# Altium PCB PCB_assembly_drawing.PcbDoc (part 5 of 5)
Units mm, origin at the board's own origin, x right, y up, seen from the top; angles counter-clockwise.
Board outline 425 x 295 mm, 2 copper layers (Top Layer, Bottom Layer); 485 components, 419 nets, 1569 pads, 847 vias.
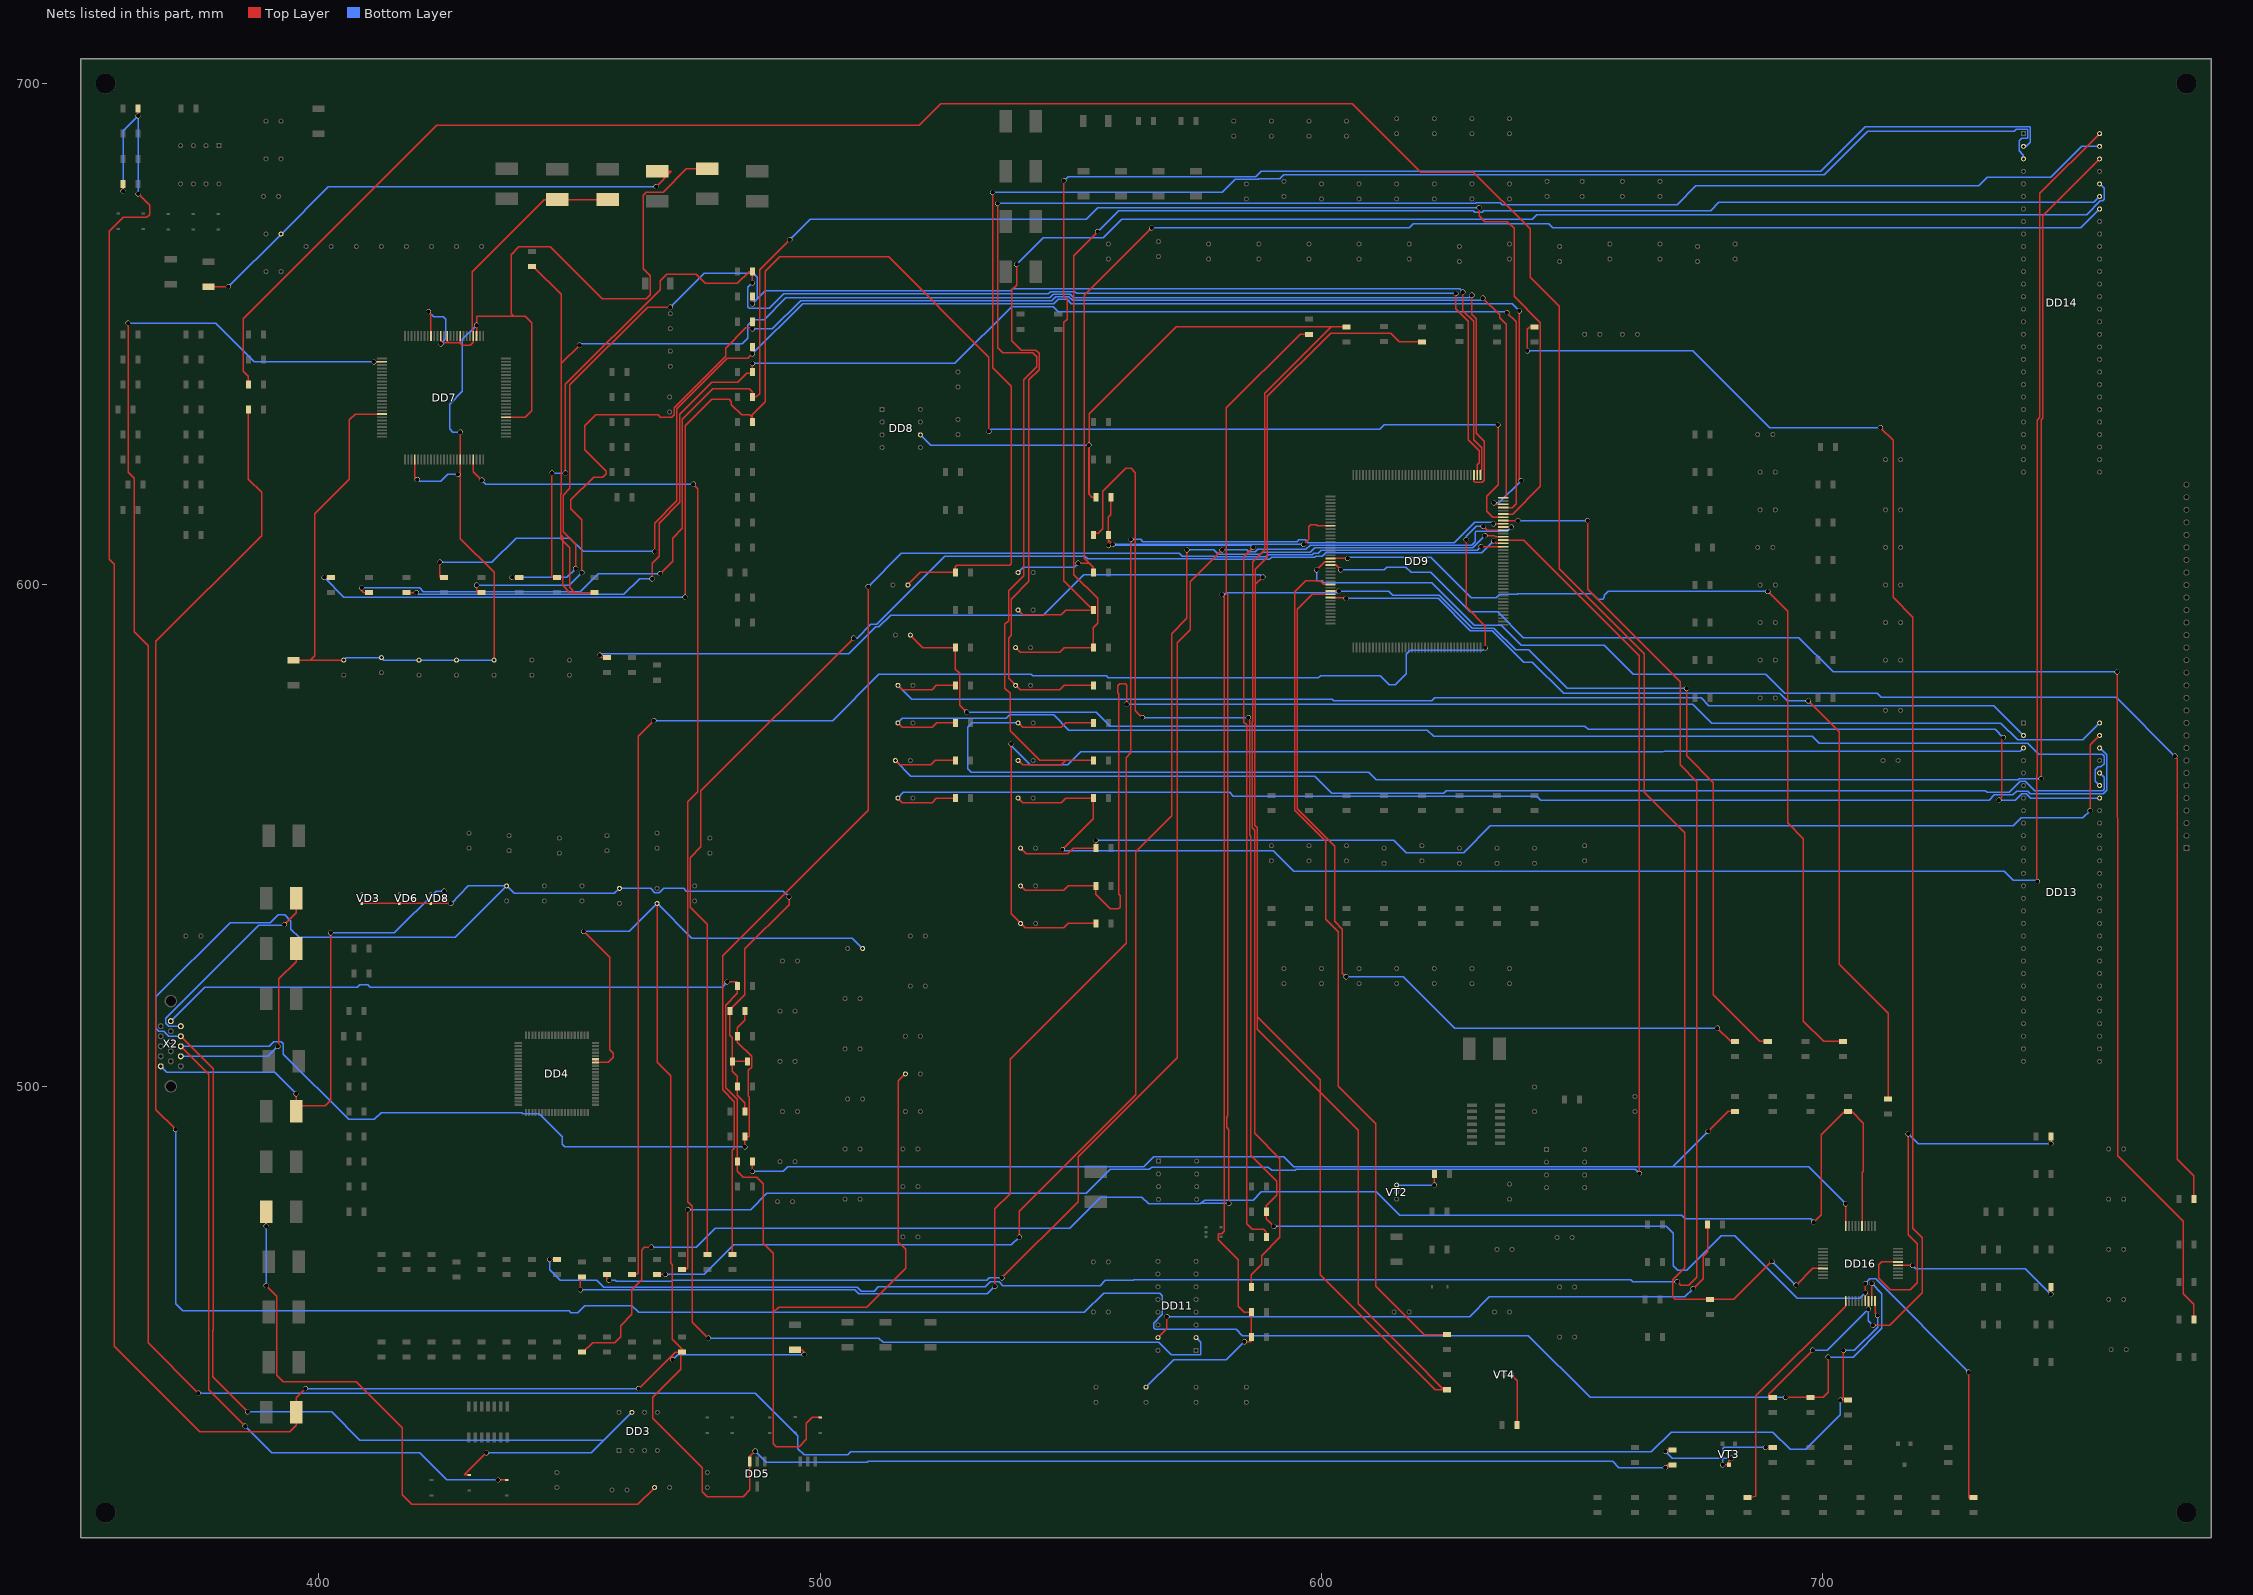
[diagram p5: the nets of this part, all layers, seen from the top]

## Via types
v1: diameter 1, hole 0.9, Top Layer to Bottom Layer, 847 vias

## Nets (pads, with @x,y where several pads share a name; then routed paths per layer and width w, separated by ;. In a path a pad name is that pad's centre, name@x,y a point inside that pad or via, vN(x,y) a via of type N, cw(c..) or ccw(c..) an arc to the next point about the centre after c; other vN are vias at no path point) (continued)
NetR236_1: R236.1 R237.1 VT3.3 | length 31.5
  Top Layer w0.25: v1(668.579,427.228) 668.851,427.5 R237.1@670,427.5 ; v1(679.983,424.5) VT3.3@681.25,424.5 681.25,425.374 v1(681.758,425.882) ; v1(688.569,427.99) 688.579,428 R236.1@690,428
  Bottom Layer w0.25: v1(668.579,427.228) 669.925,425.882 679.983,425.882 ; v1(679.983,424.5) 679.983,425.882 ; v1(681.758,425.882) 679.983,425.882 ; v1(688.569,427.99) 680.237,427.99 679.983,427.736 679.983,425.882
NetR238_1: R238.1 VT4.3 | length 10.5
  Top Layer w0.25: VT4.3@637.8,442.5 639,441.3 R238.1@639,432.5
NetR239_1: R239.1 VT2.3 | length 9.7
  Top Layer w0.25: v1(622.5,480.3) R239.1@622.5,482.5
  Bottom Layer w0.25: VT2.3@615,480.3 v1(622.5,480.3)
O3_3V: C43.1 C46.2 C48.2 C51.2 C53.2 C54.2 DD7.18 DD7.29 DD7.43 DD7.57 DD7.78 L14.2 | length 305.4
  Top Layer w0.25: C43.1@395,585 398.348,585 ; C46.2@405,585 398.348,585 ; DD7.18@412.65,634.1 407.278,634.1 406.146,632.968 406.146,621.132 399.237,614.223 399.237,585.889 398.348,585 ; DD7.29@419.15,625 419.15,621.513 v1(419.658,621.005) ; v1(427.742,622.068) 428.25,622.576 ; v1(428.25,630.473) DD7.43@428.25,625 428.25,622.576 ; DD7.78@431.5,649.7 v1(431.5,651.835) 431.5,653.593 438.912,653.593 ; C54.2@435,585 435,602.514 428.25,609.264 428.25,622.576 ; DD7.57@437.35,633.45 441.187,633.45 442.519,634.781 442.519,652.272 441.198,653.593 438.912,653.593 ; L14.2@477.5,683 473.348,683 468.706,678.358 465.328,678.358 464.744,677.774 464.744,663.042 466.115,661.67 466.115,657.86 465.353,657.098 456.54,657.098 446.227,667.41 439.928,667.41 438.379,665.861 438.379,654.126 438.912,653.593
  Bottom Layer w0.25: C46.2@405,585 405.5,585.5 C48.2@412.5,585.5 413,585 C51.2@420,585 C53.2@427.5,585 C54.2@435,585 ; v1(419.658,621.005) 419.982,620.681 424.388,620.681 425.775,622.068 v1(427.742,622.068) ; v1(428.25,630.473) 426.777,630.473 426.11,631.139 426.11,636.067 428.65,638.607 428.65,648.985 v1(431.5,651.835)
OSD_B: DD9.22 R190.2 | length 301.7
  Top Layer w0.25: DD9.22@601.8,604 602.805,604 v1(603.809,602.996) ; v1(758.657,582.676) 758.657,553.679 758.85,553.486 758.85,486.131 771.83,473.151 771.83,458.684 774,456.514 R190.2@774,453.5
  Bottom Layer w0.25: v1(603.809,602.996) 612.47,602.996 613.054,603.58 616.788,603.58 617.855,602.513 621.789,602.513 629.688,594.614 635.152,594.614 640.258,589.509 695.223,589.509 702.056,582.676 v1(758.657,582.676)
OSD_CLK: C131.1 DD9.30 R175.2 R176.2 R193.2 | length 359.3
  Top Layer w0.25: v1(580.136,598.103) 580.644,597.595 580.644,494.61 580.556,494.523 580.556,491.02 580.644,490.932 580.644,471.094 580.136,470.586 579.375,470.586 579.375,469.417 583.387,465.405 583.387,456.184 584.581,454.99 R175.2@586,454.99 ; v1(584.606,449.072) 586,449.072 R176.2@586,450 R175.2@586,454.99 ; R175.2@586,455 R175.2@586,454.99 ; DD9.30@601.8,598.8 v1(603.428,598.8) ; v1(672.821,579.374) 672.821,565.937 678.155,560.603 678.155,518.296 687.451,509 R193.2@689,509
  Bottom Layer w0.25: C131.1@565,440 570.491,445.491 581.025,445.491 v1(584.606,449.072) ; v1(580.136,598.103) 580.644,598.103 580.974,598.433 603.061,598.433 v1(603.428,598.8) 613.364,598.8 614.172,597.992 623.519,597.992 630.098,591.414 634.34,591.414 638.708,587.045 641.299,587.045 648.97,579.374 v1(672.821,579.374)
OSD_G: DD9.21 R191.2 | length 281.1
  Top Layer w0.25: v1(599.034,602.996) 600.688,604.65 DD9.21@601.8,604.65 ; v1(770.204,565.887) 770.712,565.379 770.712,485.431 774,482.143 R191.2@774,477.5
  Bottom Layer w0.25: v1(599.034,602.996) 599.034,600.964 599.161,600.837 600.114,600.837 600.495,600.456 621.944,600.456 630.467,591.933 635.852,591.933 639.801,587.985 656.387,587.985 662.178,582.193 688.619,582.193 692.37,578.443 710.797,578.443 711.626,577.613 758.478,577.613 v1(770.204,565.887)
OSD_HS: DD9.31 R194.2 | length 168.1
  Top Layer w0.25: DD9.31@601.8,598.15 598.195,598.15 595.194,595.149 595.194,555.324 602.615,547.903 602.615,532.892 604.164,531.343 604.164,522.605 v1(604.901,521.868) ; v1(678.967,511.607) 681.574,509 R194.2@682.5,509
  Bottom Layer w0.25: v1(604.901,521.868) 616.355,521.868 626.617,511.607 v1(678.967,511.607)
OSD_R: DD9.20 R192.2 | length 190.4
  Top Layer w0.25: DD9.20@601.8,605.3 605.224,605.3 v1(605.231,605.307) ; v1(689,598.703) 692.963,594.741 692.963,552.577 696.104,549.436 696.104,513.038 700.142,509 R192.2@704,509
  Bottom Layer w0.25: v1(605.231,605.307) 605.45,605.526 621.827,605.526 629.869,597.484 634.819,597.484 635.515,598.18 639.084,598.18 639.183,598.279 653.976,598.279 655.066,597.189 656.082,597.189 656.428,597.535 656.428,597.916 657.215,598.703 v1(689,598.703)
OSD_VS: DD9.32 R195.2 | length 189.8
  Top Layer w0.25: DD9.32@601.8,597.5 604.723,597.5 v1(604.917,597.306) ; v1(697.078,576.885) 703.25,570.713 703.25,524.383 713,514.633 R195.2@713,497.5
  Bottom Layer w0.25: v1(604.917,597.306) 623.291,597.306 629.709,590.888 634.052,590.888 640.322,584.618 642.074,584.618 648.309,578.383 691.388,578.383 692.887,576.885 v1(697.078,576.885)
P3_3V: C41.1 C44.2 L15.2 | length 104.7
  Top Layer w0.25: C41.1@378,659.5 v1(382,659.5) ; v1(467.309,679.45) 470.359,682.5 L15.2@467.5,682.5
  Bottom Layer w0.25: v1(382,659.5) C44.2@392.5,670 401.95,679.45 v1(467.309,679.45)
P3V3: C16.2 C38.1 C40.1 DD4.34 DD4.35 DD5.3 L12.1 R22.1 R52.1 R53.1 R237.2 | length 855.2
  Top Layer w0.25: R53.1@361,680 361,678.571 v1(361.01,678.561) ; v1(364,678.002) 366.268,675.734 366.268,673.811 365.76,673.303 361.01,673.303 358.267,670.56 358.267,605.155 359.258,604.164 359.258,448.158 376.25,431.165 394.208,431.165 395.5,432.457 L12.1@395.5,435 395.5,437.867 v1(397.358,439.725) ; v1(364,693.572) R52.1@364,695 ; v1(452.857,530.911) 458.038,525.729 458.038,507.314 458.765,506.588 458.765,505.831 457.709,504.775 DD4.34@455.222,504.775 DD4.35@455.222,505.425 ; v1(463.793,439.725) 470.575,446.507 ; C16.2@467.5,536.5 467.5,504.776 470.179,502.097 470.179,464.779 470.521,464.438 470.521,449.594 472.5,447.615 R22.1@472.5,447 R22.1@472.211,447 ; v1(470.575,445.491) 470.575,446.507 ; v1(487.07,427.269) 486,426.199 DD5.3@486,425.175 486,419.528 484.632,418.16 477.52,418.16 476.504,419.176 476.504,423.977 466.649,433.832 466.649,438.048 472.211,443.611 R22.1@472.211,447 ; C40.1@495,447.5 496.313,447.5 496.824,446.989 v1(496.824,446.481) ; v1(668.579,423.977) 669.102,424.5 R237.2@670,424.5 ; 470.575,446.507 471.068,447 R22.1@472.211,447
  Bottom Layer w0.25: v1(361.01,678.561) 361.01,690.583 v1(364,693.572) v1(364,678.002) ; v1(397.358,439.725) v1(463.793,439.725) ; v1(452.857,530.911) 461.911,530.911 C16.2@467.5,536.5 474.405,529.595 506.405,529.595 C38.1@508.5,527.5 ; v1(470.575,445.491) 471.566,446.481 v1(496.824,446.481) ; v1(487.07,427.269) 489.312,425.028 509.412,425.028 509.58,425.196 658.089,425.196 659.308,423.977 v1(668.579,423.977)
PD: DD7.2 DD16.30 R228.2 | length 642
  Top Layer w0.25: v1(361.975,652.221) 361.975,622.452 363.169,621.259 363.169,590.702 365.963,587.908 365.963,448.894 v1(376.022,438.836) ; v1(411.023,644.5) DD7.2@412.65,644.5 ; v1(703.493,437.413) v1@703.58,437.5 ; v1(704.088,447.345) 704.088,438.008 v1@703.58,437.5 ; R228.2@705,437.5 v1@703.58,437.5 ; DD16.30@710.4,457.2 710.4,454.85 v1(710.895,454.355)
  Bottom Layer w0.25: v1(361.975,652.221) 379.425,652.221 387.147,644.5 v1(411.023,644.5) ; v1(376.022,438.836) 487.045,438.836 495.554,430.327 495.554,427.736 496.799,426.491 505.536,426.491 506.146,427.101 665.785,427.101 669.722,431.038 690.042,431.038 693.471,427.609 696.62,427.609 703.493,434.482 v1(703.493,437.413) ; v1(704.088,447.345) 706.272,447.345 710.895,451.968 v1(710.895,454.355)
PDO: DD16.29 R57.2 R227.2 | length 571.5
  Top Layer w0.25: v1(371.475,491.414) 367.513,495.376 367.513,588.742 388.616,609.846 388.616,618.506 386,621.123 R57.2@386,635 ; v1(692.554,438) R227.2@697.5,438 700.024,438 701.065,439.041 v1(701.065,445.999) ; DD16.29@709.75,457.2 v1(709.75,460.718)
  Bottom Layer w0.25: v1(371.475,491.414) 371.475,456.692 372.872,455.295 449.924,455.295 450.321,454.898 451.682,454.898 453.085,456.301 462.473,456.301 463.835,454.939 552.729,454.939 556.565,458.775 567.715,458.775 568.274,458.216 568.274,454.584 566.496,452.806 566.496,451.866 566.821,451.541 582.976,451.541 584.2,450.317 641.248,450.317 653.565,438 v1(692.554,438) ; v1(701.065,445.999) 706.067,445.999 711.787,451.718 711.787,458.681 v1(709.75,460.718)
PKA_GND: DD7.79 DD7.83 DD7.87 DD7.89 DD7.92 L16.2 L17.2 | length 74.5
  Top Layer w0.25: v1(421.894,654.527) 422.4,654.021 DD7.92@422.4,649.7 ; v1(424.358,648.081) 424.35,648.089 DD7.89@424.35,649.7 424.358,648.36 425.65,648.36 425.65,648.61 ; DD7.87@425.65,649.7 425.65,648.61 ; DD7.83@428.25,649.7 428.25,648.562 ; L16.2@457.62,676.88 L17.2@447.62,676.88 445.033,676.88 430.621,662.468 430.621,651.027 430.85,650.798 DD7.79@430.85,649.7 430.85,648.416 430.276,647.842 428.616,647.842 428.25,648.208 428.25,648.562 ; 425.65,648.61 425.958,648.302 427.99,648.302 428.25,648.562
  Bottom Layer w0.25: v1(421.894,654.527) 422.91,653.511 424.871,653.511 425.374,653.009 425.374,649.097 v1(424.358,648.081)
POWER_ON_OFF: DD16.21 R211.2 | length 48
  Top Layer w0.25: R211.2@685,418 686.605,418.246 686.605,438.253 704.55,456.198 DD16.21@704.55,457.2
PSC0: DD16.35 R220.2 | length 34.4
  Top Layer w0.25: DD16.35@714.95,464.35 717.842,464.35 v1(717.88,464.312) ; v1(745.49,458.582) 745.5,458.592 R220.2@745.5,460
  Bottom Layer w0.25: v1(717.88,464.312) 718.515,463.677 740.395,463.677 v1(745.49,458.582)
PSC1: DD16.36 R210.2 | length 77.1
  Top Layer w0.25: DD16.36@714.95,465 711.708,465 711.124,464.416 711.124,461.747 713.384,459.486 717.398,459.486 718.795,460.883 718.795,468.63 716.991,470.433 v1(716.991,490.55) ; v1(745.49,488.569) 745.5,488.579 R210.2@745.5,490
  Bottom Layer w0.25: v1(716.991,490.55) 718.972,488.569 v1(745.49,488.569)
R_IN: L6.1 VD8.3 X2.1 | length 101.1
  Top Layer w0.25: L6.1@395.5,495 L6.1@395.5,496.164 ; v1(395.5,498.526) L6.1@395.5,496.164 ; v1(402.361,530.606) 402.361,497.205 401.32,496.164 L6.1@395.5,496.164 ; VD8.3@425,537.5 425.018,537.5 v1(425.018,538.937)
  Bottom Layer w0.25: X2.1@368.5,504 369.707,502.793 391.233,502.793 v1(395.5,498.526) ; v1(402.361,530.606) 415.112,530.606 423.443,538.937 v1(425.018,538.937)
R_INA0: DD9.105 R48.2 | length 276.9
  Top Layer w0.25: R48.2@482.5,466.5 482.524,466.5 482.524,487.248 482.93,487.655 482.93,496.976 480.593,499.313 480.593,526.085 509.575,555.066 v1(509.575,599.669) ; v1(631.825,607.65) DD9.105@636.25,607.65
  Bottom Layer w0.25: v1(509.575,599.669) 516.204,606.298 571.678,606.298 572.273,605.702 578.687,605.702 578.785,605.605 588.917,605.605 589.382,606.069 598.145,606.069 598.424,606.349 599.389,606.349 599.973,606.933 631.108,606.933 v1(631.825,607.65)
R_INA1: DD9.106 R47.2 | length 276.1
  Top Layer w0.25: R47.2@477.5,466.5 477.495,466.5 477.495,532.384 474.116,535.762 474.116,545.643 476.225,547.751 476.225,558.927 v1(506.705,589.407) ; v1(634.352,608.8) 634.852,608.3 DD9.106@636.25,608.3
  Bottom Layer w0.25: v1(506.705,589.407) 507.422,589.407 510.152,592.137 511.263,592.137 524.856,605.73 552.813,605.73 553.344,605.198 578.183,605.198 578.281,605.101 589.596,605.101 590.053,605.558 598.66,605.558 598.819,605.717 600.192,605.717 600.891,606.416 631.968,606.416 v1(634.352,608.8)
R_INA2: DD9.107 R46.2 | length 346.9
  Top Layer w0.25: R46.2@472.5,463.5 473.33,463.5 473.634,463.804 v1(473.634,475.437) ; DD9.107@636.25,608.95 640.359,608.95 663.397,585.912 v1(663.397,482.6)
  Bottom Layer w0.25: v1(473.634,475.437) 486.207,475.437 489.409,478.64 553.087,478.64 557.886,483.438 565.632,483.438 566.117,483.923 589.38,483.923 590.05,483.253 594.773,483.253 594.958,483.438 662.559,483.438 v1(663.397,482.6)
R_INA3: DD9.108 R45.2 | length 291.3
  Top Layer w0.25: R45.2@467.5,462.5 469.129,462.5 v1(469.138,462.509) ; v1(539.75,469.951) 539.75,475.107 562.991,498.348 562.991,546.837 570.103,553.949 570.103,590.271 573.151,593.319 v1(573.151,607.009) ; v1(632.577,609.829) 634.492,609.829 634.721,609.6 DD9.108@636.25,609.6
  Bottom Layer w0.25: v1(469.138,462.509) 476.936,462.509 482.803,468.376 538.175,468.376 v1(539.75,469.951) ; v1(573.151,607.009) 578.49,607.009 579.39,606.109 587.767,606.109 588.236,606.577 597.773,606.577 598.648,607.453 630.201,607.453 v1(632.577,609.829)
R_INA4: DD9.110 R44.2 | length 321.4
  Top Layer w0.25: R44.2@462.5,462.5 463.465,462.5 463.753,462.788 463.753,569.849 v1(466.852,572.948) ; v1(628.828,609.067) 628.828,595.655 632.663,591.82 v1(632.663,587.477) ; v1(632.257,611.683) 633.04,610.9 DD9.110@636.25,610.9
  Bottom Layer w0.25: v1(466.852,572.948) 502.515,572.948 511.736,582.168 542.112,582.168 542.392,581.889 557.073,581.889 557.495,581.467 599.402,581.467 599.835,581.9 611.757,581.9 613.562,580.095 614.739,580.095 616.942,582.298 616.942,586.187 617.728,586.973 632.159,586.973 v1(632.663,587.477) ; v1(628.828,609.067) 628.828,609.691 630.819,611.683 v1(632.257,611.683)
R_INA5: DD9.111 R43.2 | length 306.1
  Top Layer w0.25: R43.2@457.5,462.5 457.479,462.5 457.479,461.772 v1(457.937,461.315) ; v1(536.27,461.823) 551.459,477.012 551.459,485.927 571.271,505.739 571.271,588.518 573.786,591.033 573.786,600.634 v1(580.161,607.009) ; DD9.111@636.25,611.55 v1(637.87,611.55)
  Bottom Layer w0.25: v1(457.937,461.315) 459.13,461.315 459.334,461.112 470.408,461.112 470.611,461.315 533.273,461.315 533.781,461.823 v1(536.27,461.823) ; v1(580.161,607.009) 585.099,607.009 585.495,606.613 586.801,606.613 587.273,607.085 596.9,607.085 597.772,607.957 629.928,607.957 630.631,608.66 630.631,610.565 630.784,610.718 637.038,610.718 v1(637.87,611.55)
R_INA6: DD9.112 R42.2 | length 323.4
  Top Layer w0.25: v1(452.196,459.435) 452.196,462 R42.2@452.5,462 ; v1(534.848,460.121) 534.848,475.564 537.921,478.638 537.921,505.46 561.035,528.574 561.035,565.531 562,566.496 v1(562,609.117) ; v1(634.289,612.2) DD9.112@636.25,612.2
  Bottom Layer w0.25: v1(452.196,459.435) 456.382,459.435 456.391,459.426 506.886,459.426 507.676,458.636 533.363,458.636 v1(534.848,460.121) ; v1(562,609.117) 563.931,609.117 564.388,608.66 595.173,608.66 595.503,608.99 596.802,608.99 597.332,608.461 626.429,608.461 630.53,612.562 633.927,612.562 v1(634.289,612.2)
R_INA7: DD9.113 R41.2 | length 413.5
  Top Layer w0.25: v1(446.075,465.5) R41.2@447.5,465.5 ; DD9.113@636.25,612.85 v1(639.192,612.851) v1(639.192,612.851) ; v1(653.085,612.851) 653.085,599.161 671.525,580.72 671.525,564.159 674.878,560.807 674.878,461.97 673.24,460.331 671.696,460.331 v1(670.941,461.086)
  Bottom Layer w0.25: v1(446.075,465.5) 446.075,463.474 448.208,461.34 455.486,461.34 456.895,459.93 507.388,459.93 508.178,459.14 510.779,459.14 511.632,459.994 532.953,459.994 533.959,461 535.737,461 536.463,460.273 555.828,460.273 556.905,461.35 562.417,461.35 562.534,461.467 661.67,461.467 662.051,461.086 v1(670.941,461.086) ; v1(639.192,612.851) v1(653.085,612.851)
R_INB0: DD9.114 R65.2 R107.2 | length 350.6
  Top Layer w0.25: v1(401.066,601.497) 401.069,601.5 R107.2@402.5,601.5 ; v1(473.075,597.56) 473.075,631.728 478.353,637.007 481.838,637.007 482.321,636.524 482.321,635.991 484.327,633.984 485.992,633.984 486.5,633.476 ; R65.2@486.5,632.5 486.5,633.476 ; v1(533.679,630.657) 533.679,645.465 513.715,665.429 491.947,665.429 489.052,662.534 489.052,636.549 486.5,633.998 486.5,633.476 ; v1(635.178,631.927) 635.291,631.814 635.291,619.949 632.993,617.652 632.993,614.68 634.173,613.5 DD9.114@636.25,613.5
  Bottom Layer w0.25: v1(401.066,601.497) 405.003,597.56 v1(473.075,597.56) ; v1(533.679,630.657) 534.035,631.012 611.581,631.012 612.496,631.927 v1(635.178,631.927)
R_INB1: DD9.115 R64.2 R106.2 | length 361.9
  Top Layer w0.25: v1(408.584,599.415) 408.584,598.856 408.94,598.5 R106.2@410,598.5 ; v1(468.097,602.259) 470.586,604.749 470.586,609.346 472.549,611.309 472.549,633.052 478.638,639.14 485.916,639.14 486.5,638.556 R64.2@486.5,637.5 487.31,637.5 487.959,638.15 487.959,662.864 v1(493.979,668.884) ; v1(631.444,675.259) 631.444,673.608 632.562,672.49 637.032,672.49 638.404,671.119 638.404,657.555 643.636,652.323 643.636,619.662 638.124,614.15 DD9.115@636.25,614.15
  Bottom Layer w0.25: v1(408.584,599.415) 420.116,599.415 420.903,598.627 452.171,598.627 455.803,602.259 v1(468.097,602.259) ; v1(493.979,668.884) 497.992,672.897 553.06,672.897 555.422,675.259 v1(631.444,675.259)
R_INB2: DD9.117 R63.2 R105.2 | length 302.8
  Top Layer w0.25: R105.2@417.5,598.5 v1(419.506,598.5) ; v1(466.522,601.243) 466.522,604.368 467.893,605.739 467.893,612.349 472.045,616.5 472.045,634.009 478.421,640.385 483.616,640.385 485.419,642.188 486.5,642.188 R63.2@486.5,642.5 v1(486.5,644.195) ; DD9.117@636.25,615.45 638.056,615.45 638.81,616.204 638.81,652.475 v1(636.981,654.304)
  Bottom Layer w0.25: v1(419.506,598.5) 419.887,598.119 460.883,598.119 464.007,601.243 v1(466.522,601.243) ; v1(486.5,644.195) 526.898,644.195 538.201,655.498 546.506,655.498 547.497,654.507 636.778,654.507 v1(636.981,654.304)
R_INB3: DD9.118 R61.2 R104.2 | length 302.8
  Top Layer w0.25: v1(424.18,604.545) 424.18,601.5 R104.2@425,601.5 ; v1(467.004,606.679) 467.004,612.318 471.458,616.772 471.458,635.136 481.508,645.185 485.612,645.185 v1(486.5,646.073) R61.2@486.5,647.5 ; v1(634.395,616.382) 634.677,616.1 DD9.118@636.25,616.1 ; v1(639.47,654.66) 639.47,621.132 v1(639.801,620.801)
  Bottom Layer w0.25: v1(424.18,604.545) 434.553,604.545 439.365,609.357 450.104,609.357 452.783,606.679 v1(467.004,606.679) ; v1(486.5,646.073) 496.518,656.091 546.586,656.091 547.497,657.002 549.265,657.002 550.134,656.133 637.997,656.133 v1(639.47,654.66) ; v1(634.395,616.382) 635.381,616.382 v1(639.801,620.801)
R_INB4: DD9.120 R60.2 R103.2 | length 296.6
  Top Layer w0.25: v1(431.495,599.948) 431.495,598.5 R103.2@432.5,598.5 ; v1(452.476,602.463) 452.476,613.029 450.317,615.188 450.317,616.964 454.839,621.487 456.692,621.487 457.352,622.148 457.352,622.732 453.111,626.974 453.111,631.749 455.295,633.933 467.69,633.933 468.147,633.476 470.383,633.476 470.891,633.984 470.891,635.356 481.203,645.668 481.203,647.243 485.216,651.256 v1@486.5,651.256 ; v1(486.5,651.078) v1@486.5,651.256 ; R60.2@486.5,652.5 v1@486.5,651.256 ; v1(632.206,657.225) 635.555,653.876 635.555,653.288 636.854,651.988 636.854,617.4 DD9.120@636.25,617.4
  Bottom Layer w0.25: v1(431.495,599.948) 449.961,599.948 v1(452.476,602.463) ; v1(486.5,651.078) 490.499,651.078 496.104,656.683 546.17,656.683 546.993,657.506 549.615,657.506 550.353,656.768 625.401,656.768 625.413,656.756 631.737,656.756 v1(632.206,657.225)
R_INB5: DD9.121 R58.2 R102.2 | length 287.1
  Top Layer w0.25: v1(438.584,601.497) 438.587,601.5 R102.2@440,601.5 ; v1(451.256,603.25) 451.256,608.136 448.743,610.65 448.743,617.932 450.113,619.303 450.113,639.902 465.607,655.396 v1(470.129,655.396) ; v1(486.5,656.073) R58.2@486.5,657.5 ; v1(628.218,658.419) 628.218,654.736 630.377,652.577 630.377,629.008 631.998,627.387 631.998,623.08 631.7,622.783 DD9.121@631.7,621.95
  Bottom Layer w0.25: v1(438.584,601.497) 449.504,601.497 v1(451.256,603.25) ; v1(470.129,655.396) 476.885,662.153 486.74,662.153 487.477,661.416 487.477,657.05 ; v1(486.5,656.073) 487.477,657.05 ; v1(628.218,658.419) 627.583,659.054 538.404,659.054 537.997,658.647 489.074,658.647 487.477,657.05
R_INB6: DD9.122 R55.2 R101.2 | length 279.8
  Top Layer w0.25: v1(446.532,622.3) 446.532,601.5 R101.2@447.5,601.5 ; v1(449.224,622.3) 449.224,640.055 468.097,658.927 468.097,660.654 469.392,661.949 475.285,661.949 477.088,660.146 483.489,660.146 485.843,662.5 R55.2@486.5,662.5 v1(486.5,660.248) ; v1(626.796,658.139) 626.796,655.097 629.31,652.582 629.31,628.923 631.494,626.74 631.494,624.375 631.05,623.931 DD9.122@631.05,621.95
  Bottom Layer w0.25: v1(446.532,622.3) v1(449.224,622.3) ; v1(486.5,660.248) 485.597,659.345 485.597,655.498 485.902,655.193 489.864,655.193 492.735,658.063 545.534,658.063 545.985,658.514 550.777,658.514 551.152,658.139 v1(626.796,658.139)
R_INB7: DD9.123 R54.2 R100.2 | length 317.1
  Top Layer w0.25: R54.2@442.5,663.5 442.798,663.5 448.345,657.953 448.345,644.179 ; v1(452.018,647.852) 448.345,644.179 ; R100.2@455,598.5 451.104,598.5 ; v1(629.971,657.784) 629.971,654.044 630.885,653.129 630.885,630.301 632.502,628.684 632.502,620.869 632.079,620.446 630.682,620.446 630.4,620.728 DD9.123@630.4,621.95 ; 448.239,610.055 448.239,609.249 448.683,608.806 ; 448.239,610.055 448.683,609.611 448.683,608.806 ; 448.239,610.055 448.239,618.227 448.345,618.334 448.345,644.179 ; 448.683,608.806 450.088,607.4 450.088,599.516 451.104,598.5 ; 448.683,608.806 448.683,599.905 450.088,598.5 451.104,598.5
  Bottom Layer w0.25: v1(452.018,647.852) 452.298,648.132 484.48,648.132 485.572,649.224 485.572,651.84 486.664,652.932 488.823,652.932 493.166,657.276 545.755,657.276 546.489,658.01 549.869,658.01 550.603,657.276 625.891,657.276 625.907,657.26 629.447,657.26 v1(629.971,657.784)
RA0: C127.2 DD14.50 R168.1 | length 281.3
  Top Layer w0.25: v1(551.485,604.342) 553.72,604.342 ; R168.1@554.5,602.5 554.5,603.562 553.72,604.342 ; v1(566.141,671.246) 552.729,657.835 552.729,605.333 553.72,604.342
  Bottom Layer w0.25: C127.2@539.5,602.5 540.529,603.529 550.672,603.529 v1(551.485,604.342) ; v1(566.141,671.246) 617.463,671.246 618.262,672.045 645.312,672.045 646.111,671.246 751.446,671.246 DD14.50@755.2,675
RA1: C125.2 DD14.2 R167.1 | length 306.3
  Top Layer w0.25: C125.2@539.5,595 540.394,594.106 548.056,594.106 548.95,595 R167.1@554.5,595 548.64,600.86 548.64,652.372 549.265,652.997 549.265,657.002 548.64,657.627 v1(548.64,680.644)
  Bottom Layer w0.25: v1(548.64,680.644) 549.453,681.457 586.876,681.457 587.968,682.549 699.592,682.549 708.426,691.383 741.383,691.383 741.383,688.322 740.561,687.5 DD14.2@740,687.5
RA2: C123.2 DD14.51 R166.1 | length 306.5
  Top Layer w0.25: C123.2@539,587.5 539.887,586.613 547.827,586.613 548.714,587.5 R166.1@554.5,587.5 554.5,591.482 555.346,592.328 555.346,597.332 550.596,602.082 550.596,665.709 v1(555.371,670.484)
  Bottom Layer w0.25: v1(555.371,670.484) 559.537,674.649 630.302,674.649 630.573,674.379 632.06,674.379 632.331,674.649 677.596,674.649 679.272,676.326 754.026,676.326 DD14.51@755.2,677.5
RA3: C121.2 DD14.52 R165.1 | length 333.3
  Top Layer w0.25: v1(539.191,663.956) 539.191,659.816 538.251,658.876 538.251,648.716 540.139,646.828 543.052,646.828 543.673,646.207 543.673,642.962 541.604,640.893 541.604,600.71 538.099,597.205 538.099,589.933 537.591,589.425 537.591,581.409 C121.2@539,580 539.88,579.12 547.827,579.12 548.707,580 R165.1@554.5,580
  Bottom Layer w0.25: v1(539.191,663.956) 544.474,669.239 556.438,669.239 560.146,672.948 642.01,672.948 642.95,673.887 752.627,673.887 755.345,676.605 755.777,676.605 756.082,676.91 756.082,679.118 DD14.52@755.2,680
RA4: C119.2 DD14.54 R164.1 | length 377.9
  Top Layer w0.25: C119.2@539.5,572.5 540.398,571.602 548.056,571.602 548.954,572.5 R164.1@554.5,572.5 ; v1(743.534,561.383) 743.534,632.957 743.8,633.222 743.8,673.6 DD14.54@755.2,685
  Bottom Layer w0.25: C119.2@539.5,572.5 530.352,572.5 529.438,571.586 529.438,563.372 530.123,562.686 609.397,562.686 610.895,561.188 738.922,561.188 739.117,561.383 v1(743.534,561.383)
RA5: C116.2 DD14.55 R163.1 | length 369
  Top Layer w0.25: v1(535.407,676.097) 535.407,647.344 536.448,646.303 542.366,646.303 543.169,645.5 543.169,643.524 540.588,640.944 540.588,601.802 537.595,598.809 537.595,592.916 536.854,592.176 536.854,579.45 537.921,578.383 537.921,570.893 543.814,565 548.947,565 ; C116.2@539.5,565 540.391,564.109 548.056,564.109 548.947,565 ; R163.1@554.5,565 548.947,565
  Bottom Layer w0.25: v1(535.407,676.097) 630.733,676.097 630.834,676.199 635.686,676.199 636.041,675.843 670.916,675.843 674.675,679.602 731.063,679.602 732.739,681.279 745.414,681.279 751.637,687.502 755.2,687.502 DD14.55@755.2,687.5
RA6: C113.2 DD14.56 R162.1 | length 380
  Top Layer w0.25: C113.2@539.5,557.5 540.384,556.616 548.081,556.616 548.966,557.5 R162.1@554.5,557.5 554.5,553.408 v1(548.335,547.243) ; v1(742.772,540.842) 742.645,540.969 742.645,562.127 742.721,562.204 742.721,632.886 743.296,633.461 743.296,678.096 DD14.56@755.2,690
  Bottom Layer w0.25: v1(548.335,547.243) 548.564,547.014 590.372,547.014 594.462,542.925 736.168,542.925 737.976,541.117 742.497,541.117 v1(742.772,540.842)
RA7: C110.2 DD14.3 R161.1 | length 318
  Top Layer w0.25: C110.2@517.5,600 520,602.5 R161.1@527,602.5 527,603.606 527.304,603.91 537.784,603.91 538.14,604.266 538.14,639.633 534.416,643.357 v1(534.416,678.282)
  Bottom Layer w0.25: v1(534.416,678.282) 580.187,678.282 582.803,680.898 587.375,680.898 587.455,680.978 591.693,680.978 592.502,681.787 700.274,681.787 708.953,690.465 738.124,690.465 738.538,690.879 740.879,690.879 740.879,689.121 739.648,689.121 739.115,688.588 739.115,686.613 740,685.727 DD14.3@740,685
RB0: C107.2 DD13.50 R160.1 | length 266.6
  Top Layer w0.25: C107.2@518,590 520.5,587.5 R160.1@527,587.5 527,583.234 527.837,582.397 527.837,576.021 v1(529.209,574.65) ; v1(735.101,557.098) 735.66,557.657 735.66,569.214 v1(736.016,569.57)
  Bottom Layer w0.25: v1(529.209,574.65) 555.041,574.65 557.886,571.805 652.551,571.805 653.161,571.195 734.39,571.195 v1(736.016,569.57) ; v1(735.101,557.098) 738.353,557.098 739.633,558.379 740.538,558.379 741.417,557.5 DD13.50@755.2,557.5
RB1: C104.2 DD13.2 R159.1 | length 241.4
  Top Layer w0.25: C104.2@515.5,580 516.38,579.12 522.326,579.12 523.206,580 R159.1@527,580
  Bottom Layer w0.25: C104.2@515.5,580 518.322,577.178 602.168,577.178 602.477,576.869 621.952,576.869 622.551,577.469 675.691,577.469 677.277,575.882 734.118,575.882 DD13.2@740,570
RB2: C101.2 DD13.51 R158.1 | length 264.2
  Top Layer w0.25: C101.2@515.5,572.5 516.398,571.602 522.326,571.602 523.224,572.5 R158.1@527,572.5
  Bottom Layer w0.25: C101.2@515.5,572.5 516.43,573.43 537.159,573.43 537.87,574.142 546.557,574.142 549.631,571.068 621.106,571.068 622.351,569.824 697.916,569.824 699.287,568.452 740.867,568.452 743.052,566.268 755.701,566.268 756.082,565.887 756.082,564.388 755.447,563.753 754.888,563.753 754.304,563.169 754.304,560.896 DD13.51@755.2,560
RB3: C97.2 DD13.52 R157.1 | length 262.2
  Top Layer w0.25: C97.2@515,565 515.891,564.109 522.072,564.109 522.963,565 R157.1@527,565
  Bottom Layer w0.25: C97.2@515,565 518.101,561.899 598.627,561.899 602.021,558.505 624.428,558.505 624.926,559.003 732.387,559.003 732.742,558.648 737.163,558.648 739.394,560.879 740.395,560.879 742.271,559.003 755.777,559.003 756.082,559.308 756.082,561.618 DD13.52@755.2,562.5
RB4: C93.2 DD13.54 R156.1 | length 264.6
  Top Layer w0.25: C93.2@515.5,557.5 516.384,556.616 522.326,556.616 523.21,557.5 R156.1@527,557.5
  Bottom Layer w0.25: C93.2@515.5,557.5 516.622,558.622 581.711,558.622 582.434,557.899 639.182,557.899 639.186,557.903 642.96,557.903 643.765,557.098 733.156,557.098 734.202,558.144 737.878,558.144 738.617,558.883 740.894,558.883 741.383,558.394 755.904,558.394 756.59,559.079 756.59,566.11 DD13.54@755.2,567.5
RB5: C88.2 DD13.55 R155.1 | length 236.1
  Top Layer w0.25: C88.2@540,547.5 541.138,546.362 549.399,546.362 550.536,547.5 R155.1@555,547.5 v1(555,549.072) ; v1(753.313,555.015) 753.313,568.113 DD13.55@755.2,570
  Bottom Layer w0.25: v1(555,549.072) 614.426,549.072 616.89,546.608 628.371,546.608 633.705,551.942 737.972,551.942 739.596,553.567 751.865,553.567 v1(753.313,555.015)
RB6: C84.2 DD13.56 R154.1 | length 272.2
  Top Layer w0.25: C84.2@540,540 540.885,539.115 548.564,539.115 549.449,540 R154.1@555,540 555,538.312 557.88,535.432 559.505,535.432 559.835,535.762 559.835,538.054 559.587,538.302 559.587,578.266 559.343,578.51 559.343,579.882 559.75,580.288 560.832,580.288 561.111,580.009 v1(561.111,576.224)
  Bottom Layer w0.25: v1(561.111,576.224) 674.091,576.224 677.85,572.465 735.508,572.465 738.861,569.112 751.812,569.112 DD13.56@755.2,572.5
RB7: C80.2 DD13.3 R153.1 | length 257.7
  Top Layer w0.25: v1(538.099,568.325) 538.099,534.401 C80.2@540,532.5 540.903,531.597 548.564,531.597 549.467,532.5 R153.1@555,532.5
  Bottom Layer w0.25: v1(538.099,568.325) 538.099,567.919 541.909,564.109 549.377,564.109 551.993,566.725 668.198,566.725 668.325,566.852 739.352,566.852 DD13.3@740,567.5
ROM_SCL: DD16.27 R112.2 R171.1 R223.2 | length 386.7
  Top Layer w0.25: R112.2@554.5,610 554.5,610.311 555.498,610.311 556.387,611.2 556.387,618.668 560.959,623.24 562.051,623.24 562.883,622.408 562.883,574.961 v1(564.286,573.557) ; v1(585.419,573.557) 585.419,573.278 585.648,573.049 585.648,550.189 585.902,549.935 585.902,486.314 591.124,481.091 591.124,478.323 589,476.199 R171.1@589,475 589,473.584 v1(590.499,472.084) ; DD16.27@708.45,457.2 v1(708.45,458.827) v1(708.45,460.68) ; v1(729.082,443.031) 729.082,418 R223.2@730,418
  Bottom Layer w0.25: v1(564.286,573.557) v1(585.419,573.557) ; v1(590.499,472.084) 668.782,472.084 670.128,470.738 670.128,464.185 671.017,463.296 672.827,463.296 679.71,470.179 682.447,470.179 694.919,457.708 707.331,457.708 v1(708.45,458.827) ; v1(708.45,460.68) 709.367,461.597 710.516,461.597 v1(729.082,443.031)
ROM_SCL_ASIC: DD9.10 R112.1 R116.1 R172.1 | length 228.1
  Top Layer w0.25: v1(557.5,607.898) 557.5,609.016 ; R116.1@558,617.5 558,613.986 557.5,613.486 R112.1@557.5,610 557.5,609.016 ; v1(558.414,608.101) 557.5,609.016 ; v1(586.384,607.492) 584.531,605.638 584.531,572.671 585.114,572.088 585.114,472.592 586.232,471.475 588.441,471.475 589,470.916 R172.1@589,470 ; v1(596.443,608.101) 597.469,609.127 597.469,611.632 597.866,612.029 598.915,612.029 599.144,611.8 DD9.10@601.8,611.8
  Bottom Layer w0.25: v1(557.5,607.898) 585.978,607.898 v1(586.384,607.492) ; v1(558.414,608.101) v1(596.443,608.101)
ROM_SCL_EEPROM: DD8.6 R110.2 R116.2 R174.2 | length 323.2
  Top Layer w0.25: v1(553.618,627.888) 553.618,618.109 553.669,618.058 ; R116.2@555,617.5 554.228,617.499 553.669,618.058 ; R174.2@586,460 586,462.458 588.035,464.493 588.035,466.268 591.707,469.939 591.707,485.609 586.664,490.652 586.664,551.097 586.178,551.583 586.178,572.678 586.298,572.799 586.298,604.672 588.686,607.06 588.686,638.19 601.995,651.5 ; R110.2@605,651.5 601.995,651.5 ; 553.669,618.058 553.669,634.111 571.058,651.5 601.995,651.5
  Bottom Layer w0.25: DD8.6@520,629.96 522.072,627.888 v1(553.618,627.888)
ROM_SDA: DD16.28 R113.2 R225.2 | length 304.7
  Top Layer w0.25: v1(641.071,646.684) 641.071,650.967 641.604,651.5 R113.2@642.5,651.5 ; R225.2@690,438 689.198,438 689.198,438.627 v1(697.967,447.396) ; v1(709.092,455.574) 709.1,455.583 DD16.28@709.1,457.2 ; v1(709.955,452.349) 713.308,452.349 719.771,458.812 719.771,469.838 717.931,471.678 717.931,593.598 713.994,597.535 713.994,628.879 v1(711.479,631.393)
  Bottom Layer w0.25: v1(641.071,646.684) 674.065,646.684 689.356,631.393 v1(711.479,631.393) ; v1(697.967,447.396) 700.913,447.396 v1(709.092,455.574) 709.092,453.212 v1(709.955,452.349)
SCDT: DD16.17 R56.2 R201.2 | length 561.8
  Top Layer w0.25: R56.2@386,640 386,641.604 384.937,642.667 384.937,653.085 423.57,691.718 519.811,691.718 524.104,696.011 606.171,696.011 619.836,682.346 630.276,682.346 641.604,671.017 641.604,661.365 647.421,655.549 647.421,603.199 664.362,586.257 664.362,558.673 672.414,550.621 672.414,463.829 670.052,461.467 670.052,458.008 670.56,457.5 R201.2@677.5,457.5 682.188,457.5 v1(689.813,465.125) ; v1(694.639,460.35) 697.99,463.7 DD16.17@700,463.7
  Bottom Layer w0.25: v1(689.813,465.125) 694.588,460.35 v1(694.639,460.35)
VCLK00: DD9.28 R196.2 | length 171.7
  Top Layer w0.25: DD9.28@601.8,600.1 600.482,600.1 599.745,600.837 596.875,600.837 594.665,598.627 594.665,555.041 600.862,548.843 600.862,533.349 603.377,530.835 603.377,500.024 610.819,492.582 610.819,460.172 620.491,450.5 R196.2@625,450.5
VCLK01: R99.2 R169.1 R197.2 | length 552.3
  Top Layer w0.25: v1(456.082,586.003) 456.586,585.5 R99.2@457.5,585.5 ; v1(588.289,601.574) 586.816,600.1 586.816,572.244 586.802,572.23 ; R169.1@620,648.5 615.524,648.5 613.771,650.253 601.828,650.253 589.19,637.615 589.19,605.522 586.802,603.135 586.802,572.23 ; R197.2@625,439.5 R197.2@624.354,439.5 ; 586.682,552.087 586.682,552.077 587.172,551.586 587.172,513.867 587.182,513.857 ; 586.682,552.087 587.182,551.587 587.182,513.857 ; 586.682,552.087 586.682,572.047 ; 586.682,572.047 586.682,572.11 586.802,572.23 ; 586.682,572.047 586.802,572.167 586.802,572.23 ; 587.182,513.857 587.182,511.394 599.719,498.856 ; 587.182,513.857 599.719,501.32 599.719,498.856 ; 599.719,498.856 607.339,491.236 607.339,456.667 621.208,442.798 621.208,442.646 R197.2@624.354,439.5 ; 599.719,498.856 599.719,462.436 622.656,439.5 R197.2@624.354,439.5
  Bottom Layer w0.25: v1(456.082,586.003) 456.387,586.308 505.739,586.308 511.064,591.633 511.674,591.633 514.045,594.004 544.5,594.004 552.577,602.082 587.781,602.082 v1(588.289,601.574)
VGA_CON: DD16.10 R8.2 R187.1 | length 246.6
  Top Layer w0.25: v1(486.5,483.032) R8.2@486.5,485 ; v1(677.088,491.012) 681.076,495 R187.1@682.5,495 ; v1(704.545,476.58) 704.55,476.575 DD16.10@704.55,472.15
  Bottom Layer w0.25: v1(486.5,483.032) 492.608,483.032 493.547,483.972 564.54,483.972 566.547,485.978 592.477,485.978 594.484,483.972 670.047,483.972 ; v1(677.088,491.012) 670.047,483.972 ; v1(704.545,476.58) 697.154,483.972 670.047,483.972
VGA_CONN: C5.1 R1.1 R8.1 VD5.2 X2.10 | length 299.1
  Top Layer w0.25: v1(481.482,520.827) 483.5,520.827 R1.1@483.5,520 483.5,518.573 481.152,516.225 481.152,499.77 483.5,497.423 R8.1@483.5,485 483.5,483.046 484.632,481.914 487.324,481.914 488.671,480.568 488.671,468.732 490.677,466.725 490.677,454.914 ; VD5.2@500,434 498.44,434 497.256,432.816 497.256,429.577 495.833,428.155 491.236,428.155 490.677,428.714 490.677,454.914 ; C5.1@517,502.5 515.62,501.12 515.62,468.935 517.068,467.487 517.068,463.728 509.321,455.981 491.744,455.981 490.677,454.914
  Bottom Layer w0.25: X2.10@370.5,513 377.311,519.811 407.699,519.811 408.182,520.294 409.758,520.294 410.241,519.811 480.466,519.811 v1(481.482,520.827)
VGA_HS: R2.1 R3.2 R7.1 VD2.2 X2.13 | length 292.4
  Top Layer w0.25: X2.13@372.5,508 378.104,502.396 378.104,439.496 v1(385.343,432.257) ; v1(435.737,421.5) VD2.2@437.5,421.5 ; v1(485,487.943) R7.1@485,490 485.826,490 485.826,497.916 485.673,498.069 485.673,503.183 486.325,503.834 486.325,505.977 483.5,508.802 R3.2@483.5,510 483.5,511.734 485,513.234 R2.1@485,515
  Bottom Layer w0.25: X2.13@372.5,508 390.109,508 390.992,508.883 392.554,508.883 392.929,508.508 392.929,506.46 405.958,493.43 411.131,493.43 412.456,494.755 440.484,494.755 440.738,494.501 443.976,494.501 448.544,489.932 448.544,488.491 449.092,487.943 v1(485,487.943) ; v1(385.343,432.257) 390.627,426.974 420.116,426.974 425.59,421.5 v1(435.737,421.5)
VGA_SCL: L2.1 X2.15 | length 41.8
  Top Layer w0.25: v1(393.16,532.282) 395.5,534.623 L2.1@395.5,537.5
  Bottom Layer w0.25: X2.15@372.5,512 370.091,512 369.519,512.572 369.519,513.588 388.075,532.144 393.021,532.144 v1(393.16,532.282)
VGA_SDA: L3.1 X2.12 | length 41.2
  Top Layer w0.25: v1(391.871,508) 392.083,508.212 392.083,521.449 395.5,524.866 L3.1@395.5,527.5
  Bottom Layer w0.25: X2.12@372.5,506 389.871,506 v1(391.871,508)
VGA_VS: C10.1 C13.1 DD3.7 R2.2 R4.1 R4.2 R5.2 R6.1 VD1.2 VD3.2 VD6.2 VD8.2 X2.14 | length 430.4
  Top Layer w0.25: X2.14@372.5,510 378.993,503.507 378.993,451.409 378.876,451.292 378.876,442.052 v1(385.851,435.077) ; VD3.2@408.6,536.5 VD6.2@416.1,536.5 VD8.2@422.35,536.5 v1(426.366,536.5) ; VD1.2@430,422.5 429.053,422.5 v1(433.451,426.898) ; R6.1@485,495 485,496.748 483.5,498.248 R5.2@483.5,500 483.5,501.98 482.5,502.98 R4.2@482.5,505 ; R4.1@485.5,505 R4.2@482.5,505 ; v1(493.801,537.82) 493.801,536.245 485.013,527.456 485.013,518.303 482,515.29 R2.2@482,515 482,510.227 482.5,509.727 R4.2@482.5,505
  Bottom Layer w0.25: X2.14@372.5,510 370.059,510 369.062,510.997 368.071,510.997 367.513,511.556 367.513,517.83 382.331,532.648 390.373,532.648 391.937,534.213 393.192,534.213 394.437,532.968 394.437,531.368 396.088,529.717 427.217,529.717 C10.1@437.5,540 ; v1(385.851,435.077) 402.565,435.077 408.203,429.438 456.898,429.438 ; v1(426.366,536.5) 426.444,536.422 426.446,536.424 429.866,540 C10.1@437.5,540 ; v1(433.451,426.898) 454.358,426.898 456.898,429.438 ; DD3.7@462.46,435 456.898,429.438 ; v1(493.801,537.82) 492.658,538.963 473.304,538.963 472.77,539.496 468.833,539.496 467.958,538.621 467.067,538.621 466.188,539.5 C13.1@460,539.5 458.98,538.48 439.02,538.48 C10.1@437.5,540
VLCK00: C37.1 L8.2 | length 128.7
  Top Layer w0.25: L8.2@389.5,475 389.5,472.144 v1(389.509,472.135) ; v1(389.509,460.273) 391.592,458.191 391.592,442.366 392.913,441.046 407.518,441.046 416.687,431.876 416.687,418.567 418.592,416.662 463.662,416.662 C37.1@467,420
  Bottom Layer w0.25: v1(389.509,460.273) v1(389.509,472.135)
VSYNC_D: DD7.47 DD11.2 | length 323.9
  Top Layer w0.25: DD7.47@430.85,625 430.85,622.579 v1(432.526,620.903) ; v1(474.726,620.116) 475.615,619.227 475.615,558.749 473.608,556.743 473.608,476.987 474.513,476.082 474.513,452.994 v1(477.698,449.809)
  Bottom Layer w0.25: v1(432.526,620.903) 433.314,620.116 v1(474.726,620.116) ; v1(477.698,449.809) 511.708,449.809 512.572,448.945 567.563,448.945 570.052,446.456 575.894,446.456 575.894,448.986 DD11.2@575,449.88
VSYNC_IN: DD11.15 R183.1 | length 126.2
  Top Layer w0.25: DD11.15@567.38,449.88 569.163,451.663 v1(569.163,454.076) ; v1(674.141,459.664) 676.123,461.645 676.123,466.141 677,467.018 R183.1@677,472.5
  Bottom Layer w0.25: v1(569.163,454.076) 575.869,454.076 575.894,454.101 629.564,454.101 633.476,458.013 672.49,458.013 v1(674.141,459.664)
VSYNC_MCU: DD16.5 R18.1 R109.2 R203.1 | length 507.4
  Top Layer w0.25: R18.1@452.5,447 452.715,447 454.635,448.92 459.029,448.92 460.197,450.088 460.197,452.257 462.473,454.533 462.473,459.476 464.388,461.391 464.388,467.36 464.972,467.944 v1(466.369,467.944) ; v1(581.533,476.656) 581.533,491.373 581.06,491.846 581.06,493.862 581.304,494.106 581.304,598.043 581.05,598.297 581.05,635.33 595.72,650 R109.2@597.5,650 ; v1(698.17,472.948) 699.643,474.421 699.643,490.326 704.317,495 R203.1@705,495 705.714,495 708.04,492.673 708.04,483.083 707.8,482.842 DD16.5@707.8,472.15
  Bottom Layer w0.25: v1(466.369,467.944) 475.259,467.944 479.069,471.754 549.834,471.754 555.981,477.901 564.185,477.901 565.506,476.58 575.835,476.58 ; v1(581.533,476.656) 575.928,476.656 ; v1(698.17,472.948) 697.56,473.558 672.585,473.558 671.842,474.301 615.562,474.301 610.923,478.94 588.033,478.94 586.426,477.333 576.749,477.333 575.928,476.656 ; 575.835,476.58 575.928,476.656 ; 575.835,476.58 575.835,476.656 575.928,476.656
pads on no net: DD1.5 DD1.6 DD1.8 DD1.9 DD3.1 DD3.2 DD3.3 DD7.40 DD7.41 DD7.42 DD7.97 DD7.99 DD9.5 DD9.15 DD9.18 DD9.24 DD9.25 DD9.27 DD9.42 DD9.132 DD9.138 DD10.1 DD15.1 DD15.2 DD15.4 DD15.5 DD15.6 DD15.8 DD15.9 DD15.10 X1.7 X1.8 X1.9

## Silkscreen, mask and mechanical layers (free items; w line width, h text height)
Mechanical 7:
  text "BOASFORMAT|А2|101|0|834645670|233858267|1000000000|1:1|" at 0,2540 h0
  text "SET2|Superlayer=MechanicalLayer7|Wsuperlayer=MechanicalLayer8|Layergrid=MechanicalLayer9|Werase=MechanicalLayer11|Layermark=MechanicalLayer12|Layerstamp=MechanicalLayer13|Thinline=0,1|Basicline=0,1|Gridline=0,1|Boardline=0,6|Contourpolygonline=0,3|PcbGridStep=1|PcbGridCleareanceAtView=0|PcbGridNumberEach=l10|PcbGridLineEach=l2|PcbGridCountSecondaryStrip=1|PcbGridEnabledStrip=True|PcbSignalGridEnabled=True|PcbSignalShowBukva=True|RealSignalLayerNames=False|PcbGridEnabledBothSide=True|PcbPolarGridEnabled=False|PcbPolarGridAngleStep=10|PcbPolarGridRadialStep=10|SilkShowPad=True|SilkViewName=Слой маркировки|SilkShowHole=True|SilkShowAxis=False|SilkShowBukva=True|SilkShowGrid=False|SolderShowGrid=False|SolderViewName=Слой маски|SolderShowAxis=False|SolderShowBukva=False|MainViewShowGrid=False|MainViewUseShapesDrill=False|ShowBukvaOnSboky=True|Density=2,2|TableName=Таблица 1|RazrezWidth=100|RealLayerNames=False|RazrezShowBukva=False|RazrezBukva=В-В|Sher=Rz 80|Asstoplayer=MechanicalLayer1|Asstoplayer2=None|Assbottomlayer=MechanicalLayer2|Assbottomlayer2=None|AssMinDiameterHoles=2|AssDim=True|AssMech=False|AssSilk=False|AssComponentSilk=False|AssFreeSilk=False|AssSmdPads=False|AssGridEnable=False|Mirror=Horisontal|PcbGridFontSize=2|PcbGridCenterZero=False|TTStampDistance=12|MainFontSize=5|PolyStep=2|PcbDrillDrawingGridEnabled=False|PcbDrillDrawingViewName=Слой сверловки|PcbDrillDrawingShowBukva=False|PcbDrillDrawingShowAxis=False|PcbSignalLayersUseDrill=True|PcbSignalLayersUseShapesDrill=True|PcbSignalLayersShowAxis=False" at 0,0.025 h0
  text "BOASVIADRILLTABLE:none,354331,847," at 0,0 h0
  text "2BOASDRILLTABLE:circle0101,236220,Да,498,True,|circle1000,275591,Да,15,True,|circle0010,314961,Да,30,True,|circle1110,787402,Да,2,True,|circle1011,1574803,Нет,4,True," at 0,0 h0
  text "STAMP|Utv|Утв." at 0,0 h0
  text "STAMP|Design|Разраб." at 0,0 h0
  text "STAMP|Check|Пров." at 0,0 h0
  text "STAMP|Normo|Н.контр." at 0,0 h0
  text "STAMP|Tech|Т.контр." at 0,0 h0
  text "STAMP|Var|Нач. отд." at 0,0 h0
  text "STAMP|Проверил|Станкевич" at 0,0 h0
  text "STAMP|Разработал|Соколов" at 0,0 h0
  text "STAMP|Масса|150г" at 0,0 h0
  text "STAMP|Материал1|Стеклотекстолит СФ-2-35г-1,5" at 0,0 h0
  text "STAMP|Наименование1|Плата печатная" at 0,0 h0
  text "STAMP|Компания1|ЭВС, гр. 750701" at 0,0 h0
  text "STAMP|Обозначение|ГУИР.230719" at 0,0 h0
  text "TT0000#  1 *  Размер для справок." at 0,0 h0
  text "TT0001#  2 Плату изготовить комбинированным позитивным методом по ГОСТ 23752-79" at 0,0 h0
  text "TT0002#  3 Шаг координатной сетки 2 мм по ГОСТ Р 51040-97. Линии сетки нанесены через одну." at 0,0 h0
  text "TT0003#  4 Класс точности 3 по ГОСТ Р 53429-2009." at 0,0 h0
  text "TT0004#  5 Группа жесткости 3 при верхнем значении температуры окружающей среды (70±2) °С." at 0,0 h0
  text "TT0005#  6 Сведения об элементах проводящего рисунка сведены в таблицах 1, 2, 3" at 0,0 h0
  text "TT0006#  7 Позиционные обозначения ИЭТ выполнить краской МКЭ белая ОСТ92-1586-89, шрифт 2.0-ПРЗ по СТБ 992-95 методом шелкографии" at 0,0 h0
  text "TT0007#  8 Маркировать месяц и год изготовления черной краской МКЭ ОСТ4 ГО.054.205 ОМ2 по инструкции И-75-89 шрифтом 3,5 или 5 тип А ГОСТ 2.304-81." at 0,0 h0
  text "TT0008#  9 Предельные отклонения расстояний между центрами отверстий ±0,2 мм, кроме оговоренных особо." at 0,0 h0
  text "TT0009#  10 Обработка отверстий имерсионным оловом JmmPB по ГОСТ Р 56427-2015" at 0,0 h0
  text "TT0010#  11 Покрытие проводников олово PBSmm по ГОСТ P55693-13" at 0,0 h0
  text "TT0011#  12 Печатная плата должна соответствовать ГОСТ Р 53429-2009" at 0,0 h0
  text "TT0012#" at 0,0 h0
Mechanical 13:
  lines w0.1: 8,2150 20,2150 ; 8,2185 20,2185 ; 8,2210 20,2210 ; 8,2235 20,2235 ; 8,2352 20,2352 ; 13,2125 13,2270 ; 13,2292 13,2412 ; 20,2270 8,2270 8,2125 20,2125 ; 20,2292 8,2292 8,2412 20,2412 ; 20,2521 90,2521 90,2535 ; 404,2125 404,2180 589,2180 ; 404,2130 469,2130 ; 404,2135 469,2135 ; 404,2140 469,2140 539,2140 589,2140 ; 404,2145 469,2145 ; 404,2150 469,2150 ; 404,2155 469,2155 ; 404,2160 469,2160 ; 404,2165 469,2165 589,2165 ; 404,2170 469,2170 ; 404,2175 469,2175 ; 411,2155 411,2180 ; 421,2125 421,2180 ; 444,2125 444,2180 ; 459,2125 459,2180 ; 469,2125 469,2180 589,2180 ; 539,2125 539,2165 ; 539,2145 589,2145 ; 539,2160 554,2160 589,2160 ; 543.96,2145 543.96,2160 ; 548.98,2145 548.98,2160 ; 554,2145 554,2165 ; 559.57,2140 559.57,2145 ; 571,2145 571,2165 ; 589,2188 589,2180 ; 20,2125 589,2125 589,2535 20,2535 20,2125
  text "Перв. примен." at 11.975,2371.379 h5.38 r90
  text "Справ. №" at 11.975,2314.785 h5.38 r90
  text "Подп. и дата" at 11.975,2242.966 h5.38 r90
  text "Инв. № дубл." at 11.975,2213.459 h5.38 r90
  text "Взам. инв. №" at 11.975,2188.5 h5.38 r90
  text "Лит." at 543.329,2161.025 h5.38
  text "Масса" at 558.114,2161.025 h5.38
  text "Масштаб" at 573.139,2161.025 h5.38
  text "Подп. и дата" at 11.975,2159.466 h5.38 r90
  text "Изм." at 404.686,2156.025 h5.38
  text "Лист" at 412.026,2156.025 h5.38
  text "№ докум." at 426.274,2156.025 h5.38
  text "Подп." at 447.922,2156.025 h5.38
  text "Дата" at 459.965,2156.025 h5.38
  text "Разраб." at 404.533,2150.771 h5.38
  text "1:1" at 577.818,2150.393 h7.68
  text "Пров." at 404.533,2145.771 h5.38
  text "Т.контр." at 404.533,2140.771 h5.38
  text "Лист" at 540.442,2140.771 h5.38
  text "Листов" at 561.485,2140.771 h5.38
  text "1" at 581.422,2140.771 h5.38
  text "Н.контр." at 404.533,2130.771 h5.38
  text "Инв. № подл." at 11.975,2128.459 h5.38 r90
  text "Утв." at 404.533,2125.771 h5.38
  text "Копировал" at 479.533,2120.771 h5.38
  text "Формат А2" at 560.476,2120.771 h5.38